# EAGLE board SD2IEC-Quad (EAGLE 6.6.0)
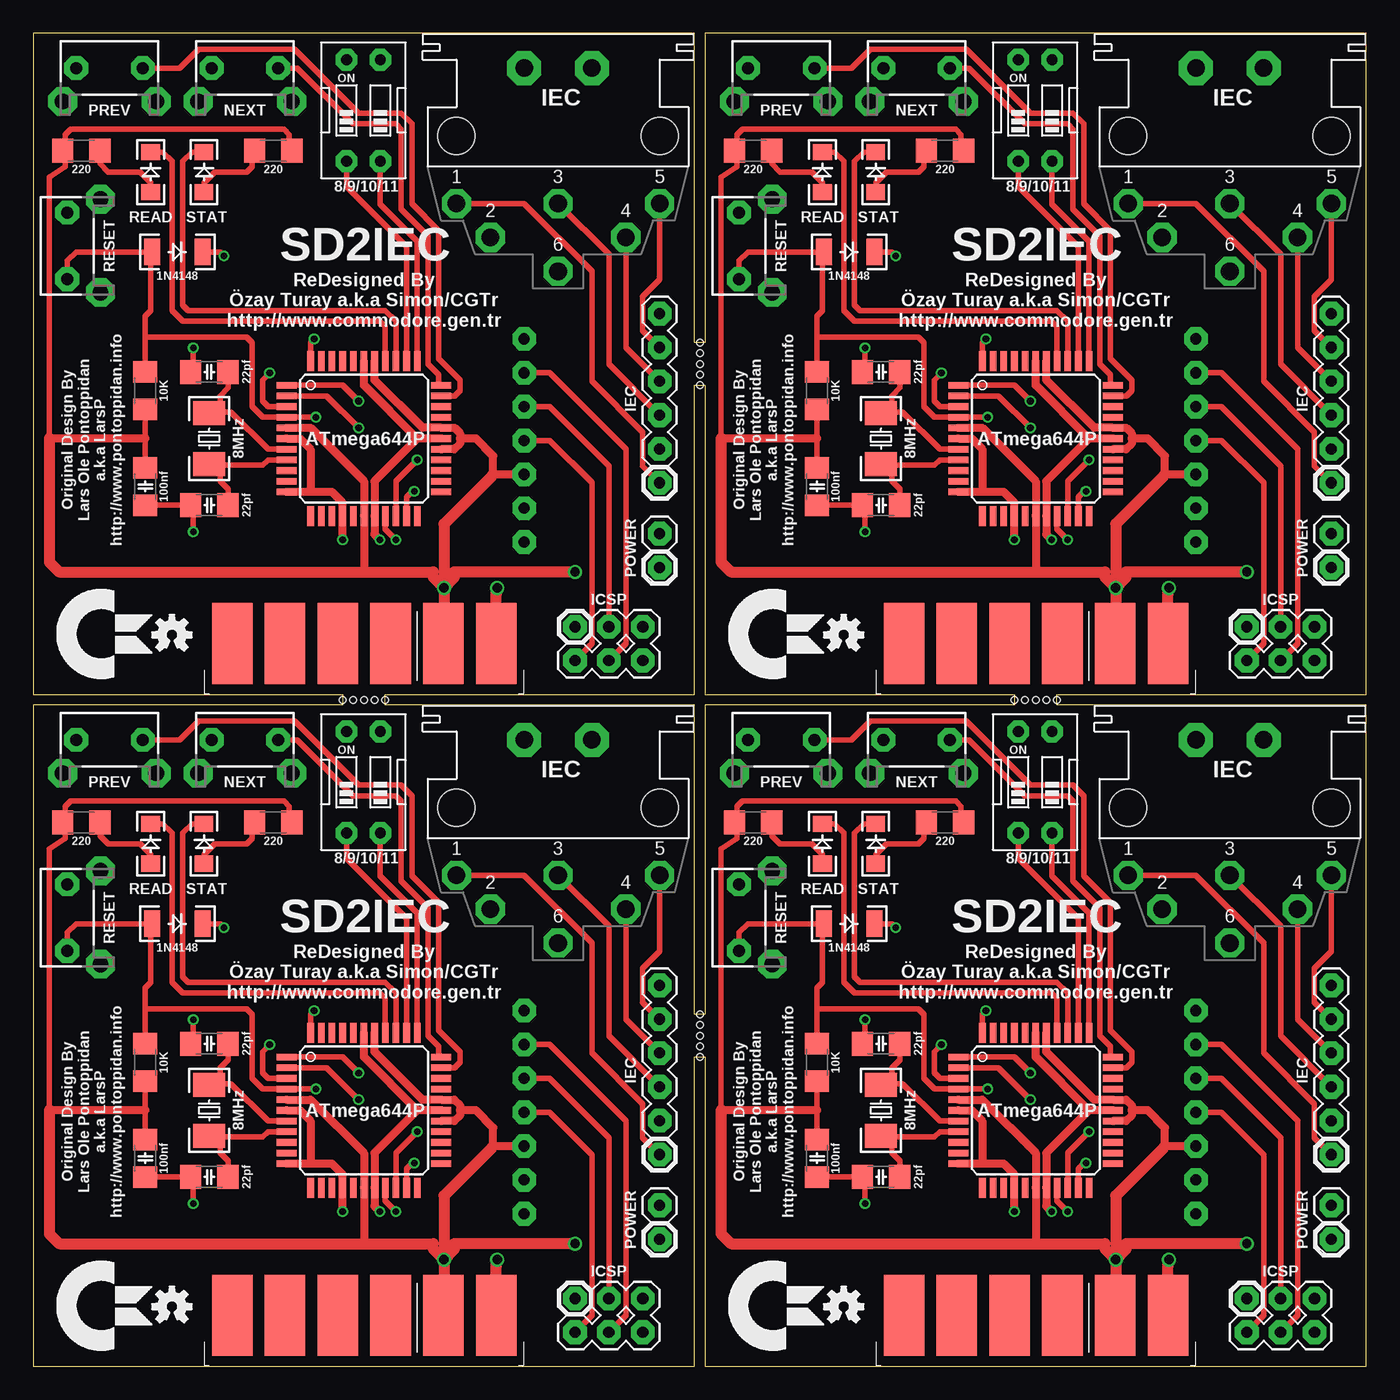
[diagram p0: board, top side]
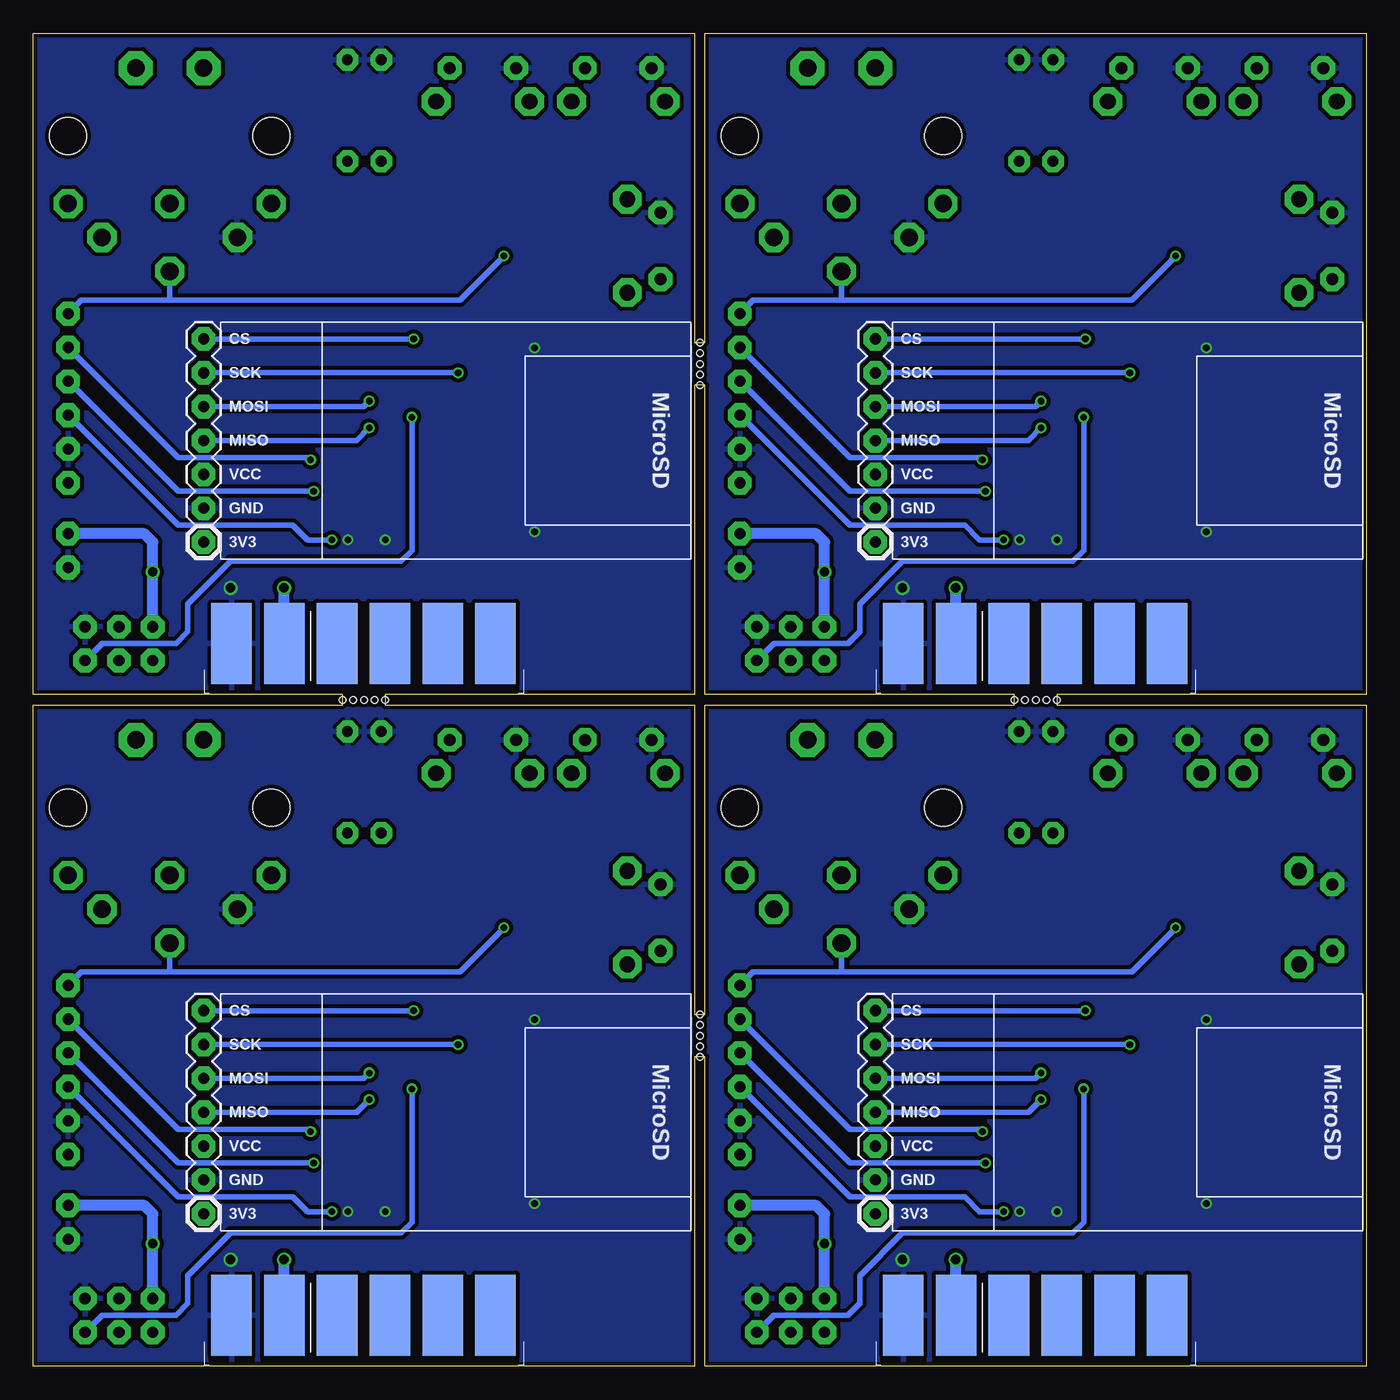
[diagram p1: board, bottom side, seen from below]

Size 100 x 100 mm. Coordinates in mm from the lower left corner, seen from the top.
Outline: 0,0 49.6,0 49.6,23.2 50.4,23.2 50.4,0 100,0 100,49.6 76.8,49.6 76.8,50.4 100,50.4 100,100 50.4,100 50.4,76.8 49.6,76.8 49.6,100 0,100 0,50.4 23.2,50.4 23.2,49.6 0,49.6 0,0
Outline: 49.6,26.4 49.6,49.6 26.4,49.6 26.4,50.4 49.6,50.4 49.6,73.6 50.4,73.6 50.4,50.4 73.6,50.4 73.6,49.6 50.4,49.6 50.4,26.4 49.6,26.4
Copper layers (1*16): Top 0.035mm / dielectric 1.5mm / Bottom 0.035mm
Design rules "DirtyPCBs": minimum track width 5mil, minimum drill 12mil, track to track 5mil, track to pad 5mil, pad to pad 5mil, via to via 5mil, smd to smd 0mil, copper to edge 10mil, drill to drill 10mil, minimum pad ring 10mil, minimum via ring 6mil, stop-mask expansion 2mil, vias tented up to drill 25mil, thermal gap 10mil
Holes 0.5 mm at 50,26.4 23.2,50 24,50 73.6,50 50,76.8 24.8,50 25.6,50 26.4,50 50,25.6 50,24.8 50,24 50,23.2 50,76 50,75.2 50,74.4 50,73.6 74.4,50 75.2,50 76,50 76.8,50

## Footprints (pad centres in the part's own frame; a part is rotated, then mirrored left to right if it is on the bottom)
CAPACITOR_CERAMIC_1206 = smd 1.6 x 1.8: 1 -1.4,0; 2 1.4,0
C64_DATASETTE_PADS = smd 3.048 x 6.096: 1 9.927,-3.781; 2 5.967,-3.781; 3 2.007,-3.781; 4 -1.953,-3.781; 5 -5.913,-3.781; 6 -9.873,-3.781 | smd 3.048 x 6.096 bottom: A 9.927,-3.781; B 5.967,-3.781; C 2.007,-3.781; D -1.953,-3.781; E -5.913,-3.781; F -9.873,-3.781
DIODE_NORMAL_SMT = smd 1.2 x 2: A -1.9,0; C 1.9,0
HDR_1X02 = drill 0.838 pad 1.778 octagon: 1 0,0; 2 2.54,0
HDR_1X06 = drill 0.838 pad 1.778 octagon: 1 0,0; 2 2.54,0; 3 5.08,0; 4 7.62,0; 5 10.16,0; 6 12.7,0
HDR_2X03 = drill 0.838 pad 1.778 octagon: 1 0,0; 2 2.54,0; 3 5.08,0; 4 0,-2.54; 5 2.54,-2.54; 6 5.08,-2.54
C64_IEC_DIN6 = drill 1.321 pad 2.184 octagon: 1 7.62,5.08; 2 5.08,7.62; 3 0,5.08; 4 -5.08,7.62; 5 -7.62,5.08; 6 0,10.16 | drill 1.321 pad 2.54 octagon: PAD@1 -2.54,-5.08; PAD@2 2.54,-5.08 | hole 2.794: 7.62,0; -7.62,0
LED_1206 = smd 1.2 x 1.4: A -1.5,0; C 1.5,0
TQFP44 = smd 1.5 x 0.5: 1 -5.8,4; 2 -5.8,3.2; 3 -5.8,2.4; 4 -5.8,1.6; 5 -5.8,0.8; 6 -5.8,0; 7 -5.8,-0.8; 8 -5.8,-1.6; 9 -5.8,-2.4; 10 -5.8,-3.2; 11 -5.8,-4; 23 5.8,-4; 24 5.8,-3.2; 25 5.8,-2.4; 26 5.8,-1.6; 27 5.8,-0.8; 28 5.8,0; 29 5.8,0.8; 30 5.8,1.6; 31 5.8,2.4; 32 5.8,3.2; 33 5.8,4 | smd 0.5 x 1.5: 12 -4,-5.8; 13 -3.2,-5.8; 14 -2.4,-5.8; 15 -1.6,-5.8; 16 -0.8,-5.8; 17 0,-5.8; 18 0.8,-5.8; 19 1.6,-5.8; 20 2.4,-5.8; 21 3.2,-5.8; 22 4,-5.8; 34 4,5.8; 35 3.2,5.8; 36 2.4,5.8; 37 1.6,5.8; 38 0.8,5.8; 39 0,5.8; 40 -0.8,5.8; 41 -1.6,5.8; 42 -2.4,5.8; 43 -3.2,5.8; 44 -4,5.8
RESISTOR_1206 = smd 1.6 x 1.8: 1 -1.4,0; 2 1.4,0
MICROSD_RTL = drill 0.838 pad 1.778 octagon: 3V3 7.62,1.27; CS -7.62,1.27; GND 5.08,1.27; MISO 0,1.27; MOSI -2.54,1.27; SCK -5.08,1.27; VCC 2.54,1.27
SWITCH_THT_SIDE = drill 0.889 pad 1.778 octagon: 1 -2.5,0; 2 2.5,0 | drill 1.194 pad 2.159 octagon: ANCHOR1 -3.5,2.5; ANCHOR2 3.5,2.5
SWITCH_DIP_02 = drill 0.813 pad 1.626 octagon: 1 -1.27,-3.81; 2 1.27,-3.81; 3 1.27,3.81; 4 -1.27,3.81
XTAL_5032 = smd 1.8 x 2.4: 1 -1.9,0; 2 1.9,0

## Placement (x,y rotation side)
C1  100nf  [CAPACITOR_CERAMIC_1206]  8.4,15.6 90 top
C2  22pf  [CAPACITOR_CERAMIC_1206]  13.2,14.2 0 top
C3  22pf  [CAPACITOR_CERAMIC_1206]  13.2,24.2 0 top
C4  100nf  [CAPACITOR_CERAMIC_1206]  58.8,15.6 90 top
C5  22pf  [CAPACITOR_CERAMIC_1206]  63.6,14.2 0 top
C6  22pf  [CAPACITOR_CERAMIC_1206]  63.6,24.2 0 top
C7  100nf  [CAPACITOR_CERAMIC_1206]  8.4,66 90 top
C8  22pf  [CAPACITOR_CERAMIC_1206]  13.2,64.6 0 top
C9  22pf  [CAPACITOR_CERAMIC_1206]  13.2,74.6 0 top
C10  100nf  [CAPACITOR_CERAMIC_1206]  58.8,66 90 top
C11  22pf  [CAPACITOR_CERAMIC_1206]  63.6,64.6 0 top
C12  22pf  [CAPACITOR_CERAMIC_1206]  63.6,74.6 0 top
CN1  DATASETTE  [C64_DATASETTE_PADS]  24.8,7.6 0 top
CN2  DATASETTE  [C64_DATASETTE_PADS]  75.2,7.6 0 top
CN3  DATASETTE  [C64_DATASETTE_PADS]  24.8,58 0 top
CN4  DATASETTE  [C64_DATASETTE_PADS]  75.2,58 0 top
D1  1N4148  [DIODE_NORMAL_SMT]  10.8,33.2 0 top
D2  1N4148  [DIODE_NORMAL_SMT]  61.2,33.2 0 top
D3  1N4148  [DIODE_NORMAL_SMT]  10.8,83.6 0 top
D4  1N4148  [DIODE_NORMAL_SMT]  61.2,83.6 0 top
J1  POWER  [HDR_1X02]  46.99,9.53 90 top
J2  IEC  [HDR_1X06]  46.99,15.88 90 top
J3  ICSP  [HDR_2X03]  40.64,5.08 0 top
J4  IEC  [C64_IEC_DIN6]  39.37,41.91 180 top
J5  IEC  [C64_IEC_DIN6]  89.77,41.91 180 top
J6  POWER  [HDR_1X02]  97.39,9.53 90 top
J7  IEC  [HDR_1X06]  97.39,15.88 90 top
J8  ICSP  [HDR_2X03]  91.04,5.08 0 top
J9  IEC  [C64_IEC_DIN6]  39.37,92.31 180 top
J10  POWER  [HDR_1X02]  46.99,59.92 90 top
J11  IEC  [HDR_1X06]  46.99,66.28 90 top
J12  ICSP  [HDR_2X03]  40.64,55.48 0 top
J13  IEC  [C64_IEC_DIN6]  89.77,92.31 180 top
J14  POWER  [HDR_1X02]  97.39,59.92 90 top
J15  IEC  [HDR_1X06]  97.39,66.28 90 top
J16  ICSP  [HDR_2X03]  91.04,55.48 0 top
LED1  STAT  [LED_1206]  12.8,39.2 90 top
LED2  READ  [LED_1206]  8.8,39.2 90 top
LED3  STAT  [LED_1206]  63.2,39.2 90 top
LED4  READ  [LED_1206]  59.2,39.2 90 top
LED5  STAT  [LED_1206]  12.8,89.6 90 top
LED6  READ  [LED_1206]  8.8,89.6 90 top
LED7  STAT  [LED_1206]  63.2,89.6 90 top
LED8  READ  [LED_1206]  59.2,89.6 90 top
LOGO1  OSHW_LOGO_SMALL  [OSHW_LOGO_SMALL]  10.4,4.47 0 top
LOGO2  OSHW_LOGO_SMALL  [OSHW_LOGO_SMALL]  60.8,4.47 0 top
LOGO3  OSHW_LOGO_SMALL  [OSHW_LOGO_SMALL]  10.4,54.87 0 top
LOGO4  OSHW_LOGO_SMALL  [OSHW_LOGO_SMALL]  60.8,54.87 0 top
MCU  ATmega644P  [TQFP44]  24.8,19.2 0 top
MCU1  ATmega644P  [TQFP44]  75.2,19.2 0 top
MCU2  ATmega644P  [TQFP44]  24.8,69.6 0 top
MCU3  ATmega644P  [TQFP44]  75.2,69.6 0 top
R1  220  [RESISTOR_1206]  18,40.8 0 top
R2  220  [RESISTOR_1206]  3.6,40.8 180 top
R3  10K  [RESISTOR_1206]  8.4,22.8 90 top
R4  220  [RESISTOR_1206]  68.4,40.8 0 top
R5  220  [RESISTOR_1206]  54,40.8 180 top
R6  10K  [RESISTOR_1206]  58.8,22.8 90 top
R7  220  [RESISTOR_1206]  18,91.2 0 top
R8  220  [RESISTOR_1206]  3.6,91.2 180 top
R9  10K  [RESISTOR_1206]  8.4,73.2 90 top
R10  220  [RESISTOR_1206]  68.4,91.2 0 top
R11  220  [RESISTOR_1206]  54,91.2 180 top
R12  10K  [RESISTOR_1206]  58.8,73.2 90 top
SD  MicroSD  [MICROSD_RTL]  38.1,19.05 270 bottom
SD1  MicroSD  [MICROSD_RTL]  88.5,19.05 270 bottom
SD2  MicroSD  [MICROSD_RTL]  38.1,69.45 270 bottom
SD3  MicroSD  [MICROSD_RTL]  88.5,69.45 270 bottom
SW1  NEXT  [SWITCH_THT_SIDE]  15.88,46.99 180 top
SW2  PREV  [SWITCH_THT_SIDE]  5.71,46.99 180 top
SW3  RESET  [SWITCH_THT_SIDE]  2.54,33.66 270 top
SW4  8/9/10/11  [SWITCH_DIP_02]  24.77,43.81 0 top
SW5  NEXT  [SWITCH_THT_SIDE]  66.28,46.99 180 top
SW6  PREV  [SWITCH_THT_SIDE]  56.12,46.99 180 top
SW7  RESET  [SWITCH_THT_SIDE]  52.94,33.66 270 top
SW8  8/9/10/11  [SWITCH_DIP_02]  75.17,43.81 0 top
SW9  NEXT  [SWITCH_THT_SIDE]  15.88,97.39 180 top
SW10  PREV  [SWITCH_THT_SIDE]  5.71,97.39 180 top
SW11  RESET  [SWITCH_THT_SIDE]  2.54,84.06 270 top
SW12  8/9/10/11  [SWITCH_DIP_02]  24.77,94.22 0 top
SW13  NEXT  [SWITCH_THT_SIDE]  66.28,97.39 180 top
SW14  PREV  [SWITCH_THT_SIDE]  56.12,97.39 180 top
SW15  RESET  [SWITCH_THT_SIDE]  52.94,84.06 270 top
SW16  8/9/10/11  [SWITCH_DIP_02]  75.17,94.22 0 top
XTAL  8MHz  [XTAL_5032]  13.2,19.2 90 top
XTAL1  8MHz  [XTAL_5032]  63.6,19.2 90 top
XTAL2  8MHz  [XTAL_5032]  13.2,69.6 90 top
XTAL3  8MHz  [XTAL_5032]  63.6,69.6 90 top

## Library data of the parts
C1-C12 D1-D4 LED1-LED8 LOGO1-LOGO4 R1-R12 SW1-SW16 = sj_standart
CN1-CN4 J4 J5 J9 J13 = sj_commodore
J1-J3 J6-J8 J10-J12 J14-J16 = sj_connectors
MCU MCU1-MCU3 XTAL XTAL1-XTAL3 = sj_mcu
SD SD1-SD3 = sj_arduino

## Nets
8/1: MCU1.35 SW8.1
8/2: MCU2.35 SW12.1
8/3: MCU3.35 SW16.1
8/9: MCU.35 SW4.1
10/1: MCU1.34 SW8.2
10/2: MCU2.34 SW12.2
10/3: MCU3.34 SW16.2
10/11: MCU.34 SW4.2
CS: MCU.44 SD.CS
CS1: MCU1.44 SD1.CS
CS2: MCU2.44 SD2.CS
CS3: MCU3.44 SD3.CS
GND: C1.1 C2.1 C3.1 CN1.1 CN1.A J1.1 J2.2 J3.3 J4.2 MCU.6 MCU.11 MCU.15 MCU.18 MCU.28 MCU.39 SD.GND SW1.2 SW2.2 SW3.1 SW4.3 SW4.4
GND1: C4.1 C5.1 C6.1 CN2.1 CN2.A J5.2 J6.1 J7.2 J8.3 MCU1.6 MCU1.11 MCU1.15 MCU1.18 MCU1.28 MCU1.39 SD1.GND SW5.2 SW6.2 SW7.1 SW8.3 SW8.4
GND2: C7.1 C8.1 C9.1 CN3.1 CN3.A J9.2 J10.1 J11.2 J12.3 MCU2.6 MCU2.11 MCU2.15 MCU2.18 MCU2.28 MCU2.39 SD2.GND SW9.2 SW10.2 SW11.1 SW12.3 SW12.4
GND3: C10.1 C11.1 C12.1 CN4.1 CN4.A J13.2 J14.1 J15.2 J16.3 MCU3.6 MCU3.11 MCU3.15 MCU3.18 MCU3.28 MCU3.39 SD3.GND SW13.2 SW14.2 SW15.1 SW16.3 SW16.4
IEC_ATN: J2.3 J4.3 MCU.19
IEC_ATN1: J5.3 J7.3 MCU1.19
IEC_ATN2: J9.3 J11.3 MCU2.19
IEC_ATN3: J13.3 J15.3 MCU3.19
IEC_CLK: J2.4 J4.4 MCU.21
IEC_CLK1: J5.4 J7.4 MCU1.21
IEC_CLK2: J9.4 J11.4 MCU2.21
IEC_CLK3: J13.4 J15.4 MCU3.21
IEC_DATA: J2.5 J4.5 MCU.20
IEC_DATA1: J5.5 J7.5 MCU1.20
IEC_DATA2: J9.5 J11.5 MCU2.20
IEC_DATA3: J13.5 J15.5 MCU3.20
IEC_RST: D1.C J2.6 J4.6
IEC_RST1: D2.C J5.6 J7.6
IEC_RST2: D3.C J9.6 J11.6
IEC_RST3: D4.C J13.6 J15.6
IEC_SRQ: J2.1 J4.1
IEC_SRQ1: J5.1 J7.1
IEC_SRQ2: J9.1 J11.1
IEC_SRQ3: J13.1 J15.1
MISO: J3.4 MCU.2 SD.MISO
MISO1: J8.4 MCU1.2 SD1.MISO
MISO2: J12.4 MCU2.2 SD2.MISO
MISO3: J16.4 MCU3.2 SD3.MISO
MOSI: J3.2 MCU.1 SD.MOSI
MOSI1: J8.2 MCU1.1 SD1.MOSI
MOSI2: J12.2 MCU2.1 SD2.MOSI
MOSI3: J16.2 MCU3.1 SD3.MOSI
NEXT: MCU.33 SW1.1
NEXT1: MCU1.33 SW5.1
NEXT2: MCU2.33 SW9.1
NEXT3: MCU3.33 SW13.1
PREV: MCU.32 SW2.1
PREV1: MCU1.32 SW6.1
PREV2: MCU2.32 SW10.1
PREV3: MCU3.32 SW14.1
READ: LED2.C MCU.37
READ1: LED2.A R2.1
READ2: LED4.C MCU1.37
READ3: LED4.A R5.1
READ4: LED6.C MCU2.37
READ5: LED6.A R8.1
READ6: LED8.C MCU3.37
READ7: LED8.A R11.1
RST: D1.A J3.6 MCU.4 R3.2 SW3.2
RST1: D2.A J8.6 MCU1.4 R6.2 SW7.2
RST2: D3.A J12.6 MCU2.4 R9.2 SW11.2
RST3: D4.A J16.6 MCU3.4 R12.2 SW15.2
SCK: J3.5 MCU.3 SD.SCK
SCK1: J8.5 MCU1.3 SD1.SCK
SCK2: J12.5 MCU2.3 SD2.SCK
SCK3: J16.5 MCU3.3 SD3.SCK
SELECT: LED1.C MCU.36
SELECT1: LED1.A R1.1
SELECT2: LED3.C MCU1.36
SELECT3: LED3.A R4.1
SELECT4: LED5.C MCU2.36
SELECT5: LED5.A R7.1
SELECT6: LED7.C MCU3.36
SELECT7: LED7.A R10.1
VCC: C1.2 CN1.2 CN1.B J1.2 J3.1 MCU.5 MCU.17 MCU.27 MCU.29 MCU.38 R1.2 R2.2 R3.1 SD.VCC
VCC1: C4.2 CN2.2 CN2.B J6.2 J8.1 MCU1.5 MCU1.17 MCU1.27 MCU1.29 MCU1.38 R4.2 R5.2 R6.1 SD1.VCC
VCC2: C7.2 CN3.2 CN3.B J10.2 J12.1 MCU2.5 MCU2.17 MCU2.27 MCU2.29 MCU2.38 R7.2 R8.2 R9.1 SD2.VCC
VCC3: C10.2 CN4.2 CN4.B J14.2 J16.1 MCU3.5 MCU3.17 MCU3.27 MCU3.29 MCU3.38 R10.2 R11.2 R12.1 SD3.VCC
XTAL1: C2.2 MCU.8 XTAL.1
XTAL2: C3.2 MCU.7 XTAL.2
XTAL3: C5.2 MCU1.8 XTAL1.1
XTAL4: C6.2 MCU1.7 XTAL1.2
XTAL5: C8.2 MCU2.8 XTAL2.1
XTAL6: C9.2 MCU2.7 XTAL2.2
XTAL7: C11.2 MCU3.8 XTAL3.1
XTAL8: C12.2 MCU3.7 XTAL3.2

## Tracks (layer width: path | path; a pad name or v marks a point on that pad's centre or on a via)
8/1
  Top 0.406: SW8.1 73.89,38.1 78.4,33.6 MCU1.35
8/2
  Top 0.406: SW12.1 23.5,88.5 28,84 MCU2.35
8/3
  Top 0.406: SW16.1 73.89,88.5 78.4,84 MCU3.35
8/9
  Top 0.406: SW4.1 23.5,38.1 28,33.6 MCU.35
10/1
  Top 0.406: SW8.2 76.44,36.77 79.2,34 MCU1.34
10/2
  Top 0.406: SW12.2 26.04,87.17 28.8,84.4 MCU2.34
10/3
  Top 0.406: SW16.2 76.44,87.17 79.2,84.4 MCU3.34
10/11
  Top 0.406: SW4.2 26.04,36.77 28.8,34 MCU.34
CS  (via drill 0.5)
  Top 0.406: v21.07,26.67 20.8,26.4 MCU.44
  Bottom 0.406: SD.CS v21.07,26.67
CS1  (via drill 0.5)
  Top 0.406: v71.47,26.67 71.2,26.4 MCU1.44
  Bottom 0.406: SD1.CS v71.47,26.67
CS2  (via drill 0.5)
  Top 0.406: v21.07,77.07 20.8,76.8 MCU2.44
  Bottom 0.406: SD2.CS v21.07,77.07
CS3  (via drill 0.5)
  Top 0.406: v71.47,77.07 71.2,76.8 MCU3.44
  Bottom 0.406: SD3.CS v71.47,77.07
GND  (via drill 0.5, 0.7)
  Top 0.406: C1.1 C2.1 12,14 v12,12.2 | v12,26 12,24.4 C3.1
  Top 0.61: MCU.28 28.8,19.2 | 28.8,19.2 25.6,16 MCU.18 25.6,12 v26,11.6 | 28.8,19.2 24.8,23.2 MCU.39 | v23.2,11.6 MCU.15 23.2,14.4 22.4,15.2 20.8,15.2 | MCU.6 20,19.2 20.8,18.4 20.8,15.2 | 20.8,15.2 MCU.11
  Top 0.813: CN1.1 34.73,7.53 v34.8,8
  pour Bottom (isolate 0.305): 0,49.6 49.6,49.6 49.6,0 0,0
GND1  (via drill 0.5, 0.7)
  Top 0.406: C4.1 C5.1 62.4,14 v62.4,12.2 | v62.4,26 62.4,24.4 C6.1
  Top 0.61: MCU1.28 79.2,19.2 | 79.2,19.2 76,16 MCU1.18 76,12 v76.4,11.6 | 79.2,19.2 75.2,23.2 MCU1.39 | v73.6,11.6 MCU1.15 73.6,14.4 72.8,15.2 71.2,15.2 | MCU1.6 70.4,19.2 71.2,18.4 71.2,15.2 | 71.2,15.2 MCU1.11
  Top 0.813: CN2.1 85.13,7.53 v85.2,8
  pour Bottom (isolate 0.305): 50.4,49.6 100,49.6 100,0 50.4,0
GND2  (via drill 0.5, 0.7)
  Top 0.406: C7.1 C8.1 12,64.4 v12,62.6 | v12,76.4 12,74.8 C9.1
  Top 0.61: MCU2.28 28.8,69.6 | 28.8,69.6 25.6,66.4 MCU2.18 25.6,62.4 v26,62 | 28.8,69.6 24.8,73.6 MCU2.39 | v23.2,62 MCU2.15 23.2,64.8 22.4,65.6 20.8,65.6 | MCU2.6 20,69.6 20.8,68.8 20.8,65.6 | 20.8,65.6 MCU2.11
  Top 0.813: CN3.1 34.73,57.93 v34.8,58.4
  pour Bottom (isolate 0.305): 0,100 49.6,100 49.6,50.4 0,50.4
GND3  (via drill 0.5, 0.7)
  Top 0.406: C10.1 C11.1 62.4,64.4 v62.4,62.6 | v62.4,76.4 62.4,74.8 C12.1
  Top 0.61: MCU3.28 79.2,69.6 | 79.2,69.6 76,66.4 MCU3.18 76,62.4 v76.4,62 | 79.2,69.6 75.2,73.6 MCU3.39 | v73.6,62 MCU3.15 73.6,64.8 72.8,65.6 71.2,65.6 | MCU3.6 70.4,69.6 71.2,68.8 71.2,65.6 | 71.2,65.6 MCU3.11
  Top 0.813: CN4.1 85.13,57.93 v85.2,58.4
  pour Bottom (isolate 0.305): 50.4,100 100,100 100,50.4 50.4,50.4
IEC_ATN  (via drill 0.5)
  Top 0.406: MCU.19 26.4,12.4 v27.2,11.6 | J2.3 43.18,24.77 43.18,33.02 J4.3
  Bottom 0.406: J2.3 38.73,12.7 30.12,12.7 29.02,11.6 v27.2,11.6
IEC_ATN1  (via drill 0.5)
  Top 0.406: MCU1.19 76.8,12.4 v77.6,11.6 | J7.3 93.58,24.77 93.58,33.02 J5.3
  Bottom 0.406: J7.3 89.14,12.7 80.53,12.7 79.42,11.6 v77.6,11.6
IEC_ATN2  (via drill 0.5)
  Top 0.406: MCU2.19 26.4,62.8 v27.2,62 | J11.3 43.18,75.17 43.18,83.42 J9.3
  Bottom 0.406: J11.3 38.73,63.1 30.12,63.1 29.02,62 v27.2,62
IEC_ATN3  (via drill 0.5)
  Top 0.406: MCU3.19 76.8,62.8 v77.6,62 | J15.3 93.58,75.17 93.58,83.42 J13.3
  Bottom 0.406: J15.3 89.14,63.1 80.53,63.1 79.42,62 v77.6,62
IEC_CLK  (via drill 0.5)
  Top 0.406: v28.57,15.24 28.44,15.24 28,14.8 MCU.21 | J2.4 44.45,26.04 J4.4
  Bottom 0.406: J2.4 38.73,15.24 v28.57,15.24
IEC_CLK1  (via drill 0.5)
  Top 0.406: v78.97,15.24 78.84,15.24 78.4,14.8 MCU1.21 | J7.4 94.85,26.04 J5.4
  Bottom 0.406: J7.4 89.14,15.24 v78.97,15.24
IEC_CLK2  (via drill 0.5)
  Top 0.406: v28.57,65.64 28.44,65.64 28,65.2 MCU2.21 | J11.4 44.45,76.44 J9.4
  Bottom 0.406: J11.4 38.73,65.64 v28.57,65.64
IEC_CLK3  (via drill 0.5)
  Top 0.406: v78.97,65.64 78.84,65.64 78.4,65.2 MCU3.21 | J15.4 94.85,76.44 J13.4
  Bottom 0.406: J15.4 89.14,65.64 v78.97,65.64
IEC_DATA  (via drill 0.5)
  Top 0.406: MCU.20 27.2,16 v28.8,17.6 | J2.5 45.72,27.3 45.72,29.84 46.99,31.11 J4.5
  Bottom 0.406: J2.5 38.73,17.78 28.98,17.78 v28.8,17.6
IEC_DATA1  (via drill 0.5)
  Top 0.406: MCU1.20 77.6,16 v79.2,17.6 | J7.5 96.12,27.3 96.12,29.84 97.39,31.11 J5.5
  Bottom 0.406: J7.5 89.14,17.78 79.38,17.78 v79.2,17.6
IEC_DATA2  (via drill 0.5)
  Top 0.406: MCU2.20 27.2,66.4 v28.8,68 | J11.5 45.72,77.7 45.72,80.25 46.99,81.52 J9.5
  Bottom 0.406: J11.5 38.73,68.18 28.98,68.18 v28.8,68
IEC_DATA3  (via drill 0.5)
  Top 0.406: MCU3.20 77.6,66.4 v79.2,68 | J15.5 96.12,77.7 96.12,80.25 97.39,81.52 J13.5
  Bottom 0.406: J15.5 89.14,68.18 79.38,68.18 v79.2,68
IEC_RST  (via drill 0.5)
  Top 0.406: D1.C 14,33.2 v14.3,32.9
  Bottom 0.406: 39.37,29.6 17.6,29.6 v14.3,32.9 | 39.37,29.6 46,29.6 46.99,28.61 J2.6 | J4.6 39.37,29.6
IEC_RST1  (via drill 0.5)
  Top 0.406: D2.C 64.4,33.2 v64.7,32.9
  Bottom 0.406: 89.77,29.6 68,29.6 v64.7,32.9 | 89.77,29.6 96.4,29.6 97.39,28.61 J7.6 | J5.6 89.77,29.6
IEC_RST2  (via drill 0.5)
  Top 0.406: D3.C 14,83.6 v14.3,83.3
  Bottom 0.406: 39.37,80 17.6,80 v14.3,83.3 | 39.37,80 46,80 46.99,79.01 J11.6 | J9.6 39.37,80
IEC_RST3  (via drill 0.5)
  Top 0.406: D4.C 64.4,83.6 v64.7,83.3
  Bottom 0.406: 89.77,80 68,80 v64.7,83.3 | 89.77,80 96.4,80 97.39,79.01 J15.6 | J13.6 89.77,80
IEC_SRQ
  Top 0.406: J2.1 45.72,17.14 45.72,19.68 41.91,23.5 41.91,31.75 36.83,36.83 J4.1
IEC_SRQ1
  Top 0.406: J7.1 96.12,17.14 96.12,19.68 92.31,23.5 92.31,31.75 87.23,36.83 J5.1
IEC_SRQ2
  Top 0.406: J11.1 45.72,67.55 45.72,70.08 41.91,73.89 41.91,82.15 36.83,87.23 J9.1
IEC_SRQ3
  Top 0.406: J15.1 96.12,67.55 96.12,70.08 92.31,73.89 92.31,82.15 87.23,87.23 J13.1
MISO  (via drill 0.5)
  Top 0.406: v24.4,20 22,22.4 MCU.2 | SD.MISO 38.73,19.05 41.91,15.88 41.91,3.81 J3.4
  Bottom 0.406: SD.MISO 25.35,19.05 v24.4,20
MISO1  (via drill 0.5)
  Top 0.406: v74.8,20 72.4,22.4 MCU1.2 | SD1.MISO 89.14,19.05 92.31,15.88 92.31,3.81 J8.4
  Bottom 0.406: SD1.MISO 75.75,19.05 v74.8,20
MISO2  (via drill 0.5)
  Top 0.406: v24.4,70.4 22,72.8 MCU2.2 | SD2.MISO 38.73,69.45 41.91,66.28 41.91,54.21 J12.4
  Bottom 0.406: SD2.MISO 25.35,69.45 v24.4,70.4
MISO3  (via drill 0.5)
  Top 0.406: v74.8,70.4 72.4,72.8 MCU3.2 | SD3.MISO 89.14,69.45 92.31,66.28 92.31,54.21 J16.4
  Bottom 0.406: SD3.MISO 75.75,69.45 v74.8,70.4
MOSI  (via drill 0.5)
  Top 0.406: v24.4,22 23.2,23.2 MCU.1 | SD.MOSI 38.73,21.59 43.18,17.14 J3.2
  Bottom 0.406: SD.MOSI 24.81,21.59 v24.4,22
MOSI1  (via drill 0.5)
  Top 0.406: v74.8,22 73.6,23.2 MCU1.1 | SD1.MOSI 89.14,21.59 93.58,17.14 J8.2
  Bottom 0.406: SD1.MOSI 75.21,21.59 v74.8,22
MOSI2  (via drill 0.5)
  Top 0.406: v24.4,72.4 23.2,73.6 MCU2.1 | SD2.MOSI 38.73,71.99 43.18,67.55 J12.2
  Bottom 0.406: SD2.MOSI 24.81,71.99 v24.4,72.4
MOSI3  (via drill 0.5)
  Top 0.406: v74.8,72.4 73.6,73.6 MCU3.1 | SD3.MOSI 89.14,71.99 93.58,67.55 J16.2
  Bottom 0.406: SD3.MOSI 75.21,71.99 v74.8,72.4
NEXT
  Top 0.406: SW1.1 19.81,46.99 24,42.8 27.2,42.8 27.6,42.4 27.6,36.4 29.6,34.4 29.6,24.8 30.4,24 30.4,23.4 MCU.33
NEXT1
  Top 0.406: SW5.1 70.21,46.99 74.4,42.8 77.6,42.8 78,42.4 78,36.4 80,34.4 80,24.8 80.8,24 80.8,23.4 MCU1.33
NEXT2
  Top 0.406: SW9.1 19.81,97.39 24,93.2 27.2,93.2 27.6,92.8 27.6,86.8 29.6,84.8 29.6,75.2 30.4,74.4 30.4,73.8 MCU2.33
NEXT3
  Top 0.406: SW13.1 70.21,97.39 74.4,93.2 77.6,93.2 78,92.8 78,86.8 80,84.8 80,75.2 80.8,74.4 80.8,73.8 MCU3.33
PREV
  Top 0.406: SW2.1 10.99,46.99 12.4,48.4 19.6,48.4 24.4,43.6 27.6,43.6 28.4,42.8 28.4,36.8 30.4,34.8 30.4,25.2 32,23.6 32,22.8 31.6,22.4 MCU.32
PREV1
  Top 0.406: SW6.1 61.39,46.99 62.8,48.4 70,48.4 74.8,43.6 78,43.6 78.8,42.8 78.8,36.8 80.8,34.8 80.8,25.2 82.4,23.6 82.4,22.8 82,22.4 MCU1.32
PREV2
  Top 0.406: SW10.1 10.99,97.39 12.4,98.8 19.6,98.8 24.4,94 27.6,94 28.4,93.2 28.4,87.2 30.4,85.2 30.4,75.6 32,74 32,73.2 31.6,72.8 MCU2.32
PREV3
  Top 0.406: SW14.1 61.39,97.39 62.8,98.8 70,98.8 74.8,94 78,94 78.8,93.2 78.8,87.2 80.8,85.2 80.8,75.6 82.4,74 82.4,73.2 82,72.8 MCU3.32
READ
  Top 0.406: LED2.C 9.7,40.7 10.4,40 10.4,28.8 11.2,28 26,28 26.4,27.6 MCU.37
READ1
  Top 0.406: R2.1 5,39.8 5.6,39.2 8,39.2 8.8,38.4 LED2.A
READ2
  Top 0.406: LED4.C 60.1,40.7 60.8,40 60.8,28.8 61.6,28 76.4,28 76.8,27.6 MCU1.37
READ3
  Top 0.406: R5.1 55.4,39.8 56,39.2 58.4,39.2 59.2,38.4 LED4.A
READ4
  Top 0.406: LED6.C 9.7,91.1 10.4,90.4 10.4,79.2 11.2,78.4 26,78.4 26.4,78 MCU2.37
READ5
  Top 0.406: R8.1 5,90.2 5.6,89.6 8,89.6 8.8,88.8 LED6.A
READ6
  Top 0.406: LED8.C 60.1,91.1 60.8,90.4 60.8,79.2 61.6,78.4 76.4,78.4 76.8,78 MCU3.37
READ7
  Top 0.406: R11.1 55.4,90.2 56,89.6 58.4,89.6 59.2,88.8 LED8.A
RST  (via drill 0.5)
  Top 0.406: R3.2 8.4,26.8 | 8.4,26.8 8.4,28.4 8.8,28.8 8.8,33.1 D1.A 3.2,33.2 2.54,32.54 SW3.2 | 8.4,26.8 16,26.8 16.4,26.4 16.4,21.6 17.2,20.8 MCU.4 v21.2,20.8
  Bottom 0.406: J3.6 44.45,3.81 38.9,3.81 38,4.71 38,6.8 34.8,10 22,10 21.2,10.8 v21.2,20.8
RST1  (via drill 0.5)
  Top 0.406: R6.2 58.8,26.8 | 58.8,26.8 58.8,28.4 59.2,28.8 59.2,33.1 D2.A 53.6,33.2 52.94,32.54 SW7.2 | 58.8,26.8 66.4,26.8 66.8,26.4 66.8,21.6 67.6,20.8 MCU1.4 v71.6,20.8
  Bottom 0.406: J8.6 94.85,3.81 89.3,3.81 88.4,4.71 88.4,6.8 85.2,10 72.4,10 71.6,10.8 v71.6,20.8
RST2  (via drill 0.5)
  Top 0.406: R9.2 8.4,77.2 | 8.4,77.2 8.4,78.8 8.8,79.2 8.8,83.5 D3.A 3.2,83.6 2.54,82.94 SW11.2 | 8.4,77.2 16,77.2 16.4,76.8 16.4,72 17.2,71.2 MCU2.4 v21.2,71.2
  Bottom 0.406: J12.6 44.45,54.21 38.9,54.21 38,55.11 38,57.2 34.8,60.4 22,60.4 21.2,61.2 v21.2,71.2
RST3  (via drill 0.5)
  Top 0.406: R12.2 58.8,77.2 | 58.8,77.2 58.8,78.8 59.2,79.2 59.2,83.5 D4.A 53.6,83.6 52.94,82.94 SW15.2 | 58.8,77.2 66.4,77.2 66.8,76.8 66.8,72 67.6,71.2 MCU3.4 v71.6,71.2
  Bottom 0.406: J16.6 94.85,54.21 89.3,54.21 88.4,55.11 88.4,57.2 85.2,60.4 72.4,60.4 71.6,61.2 v71.6,71.2
SCK  (via drill 0.5)
  Top 0.406: v17.73,24.13 17.2,23.6 17.2,22 17.6,21.6 MCU.3 | SD.SCK 38.73,24.13 44.45,18.41 44.45,3.81 J3.5
  Bottom 0.406: SD.SCK v17.73,24.13
SCK1  (via drill 0.5)
  Top 0.406: v68.13,24.13 67.6,23.6 67.6,22 68,21.6 MCU1.3 | SD1.SCK 89.14,24.13 94.85,18.41 94.85,3.81 J8.5
  Bottom 0.406: SD1.SCK v68.13,24.13
SCK2  (via drill 0.5)
  Top 0.406: v17.73,74.53 17.2,74 17.2,72.4 17.6,72 MCU2.3 | SD2.SCK 38.73,74.53 44.45,68.81 44.45,54.21 J12.5
  Bottom 0.406: SD2.SCK v17.73,74.53
SCK3  (via drill 0.5)
  Top 0.406: v68.13,74.53 67.6,74 67.6,72.4 68,72 MCU3.3 | SD3.SCK 89.14,74.53 94.85,68.81 94.85,54.21 J16.5
  Bottom 0.406: SD3.SCK v68.13,74.53
SELECT
  Top 0.406: LED1.C 11.9,40.7 11.2,40 11.2,29.2 11.6,28.8 26.4,28.8 27.2,28 MCU.36
SELECT1
  Top 0.406: R1.1 16.6,40.2 16.4,40 16.4,39.6 16,39.2 13.6,39.2 12.8,38.4 LED1.A
SELECT2
  Top 0.406: LED3.C 62.3,40.7 61.6,40 61.6,29.2 62,28.8 76.8,28.8 77.6,28 MCU1.36
SELECT3
  Top 0.406: R4.1 67,40.2 66.8,40 66.8,39.6 66.4,39.2 64,39.2 63.2,38.4 LED3.A
SELECT4
  Top 0.406: LED5.C 11.9,91.1 11.2,90.4 11.2,79.6 11.6,79.2 26.4,79.2 27.2,78.4 MCU2.36
SELECT5
  Top 0.406: R7.1 16.6,90.6 16.4,90.4 16.4,90 16,89.6 13.6,89.6 12.8,88.8 LED5.A
SELECT6
  Top 0.406: LED7.C 62.3,91.1 61.6,90.4 61.6,79.6 62,79.2 76.8,79.2 77.6,78.4 MCU3.36
SELECT7
  Top 0.406: R10.1 67,90.6 66.8,90.4 66.8,90 66.4,89.6 64,89.6 63.2,88.8 LED7.A
VCC  (via drill 0.7)
  Top 0.406: C1.2 8.4,19.2 R3.1 | R1.2 19.2,41 19.2,42 18.8,42.4 2.8,42.4 2.4,42 2.4,41 R2.2 2.4,40.6 2.4,39.6 1.2,38.8 1.2,19.2 | 30.8,3.85 CN1.2 | 34.51,16.51 34.4,16.4
  Top 0.61: MCU.38 25.6,23.6 29.2,20 MCU.29 31.6,20 32,19.6 32,19.2 | MCU.5 20.8,20 24.8,16 MCU.17 24.8,9.2 | SD.VCC 34.51,16.51 34.51,17.89 33.2,19.2 32,19.2 | 8.4,19.2 1.2,19.2 | 32,19.2 32,18.8 31.6,18.4 MCU.27
  Top 0.813: 1.2,19.2 1.2,9.93 1.93,9.2 24.8,9.2 30,9.2 30,8.8 v30.8,8 | 34.4,16.4 30.8,12.8 v30.8,8 | v30.8,8 30.8,3.85 | v40.64,9.2 31.6,9.2 31.6,8.8 v30.8,8
  Bottom 0.406: 30.77,7.97 v30.8,8
  Bottom 0.813: CN1.2 30.77,7.97 | J3.1 v40.64,9.2 40.64,11.43 41.27,12.06 J1.2
VCC1  (via drill 0.7)
  Top 0.406: C4.2 58.8,19.2 R6.1 | R4.2 69.6,41 69.6,42 69.2,42.4 53.2,42.4 52.8,42 52.8,41 R5.2 52.8,40.6 52.8,39.6 51.6,38.8 51.6,19.2 | 81.2,3.85 CN2.2 | 84.91,16.51 84.8,16.4
  Top 0.61: MCU1.38 76,23.6 79.6,20 MCU1.29 82,20 82.4,19.6 82.4,19.2 | MCU1.5 71.2,20 75.2,16 MCU1.17 75.2,9.2 | SD1.VCC 84.91,16.51 84.91,17.89 83.6,19.2 82.4,19.2 | 58.8,19.2 51.6,19.2 | 82.4,19.2 82.4,18.8 82,18.4 MCU1.27
  Top 0.813: 51.6,19.2 51.6,9.93 52.33,9.2 75.2,9.2 80.4,9.2 80.4,8.8 v81.2,8 | 84.8,16.4 81.2,12.8 v81.2,8 | v81.2,8 81.2,3.85 | v91.04,9.2 82,9.2 82,8.8 v81.2,8
  Bottom 0.406: 81.17,7.97 v81.2,8
  Bottom 0.813: CN2.2 81.17,7.97 | J8.1 v91.04,9.2 91.04,11.43 91.67,12.06 J6.2
VCC2  (via drill 0.7)
  Top 0.406: C7.2 8.4,69.6 R9.1 | R7.2 19.2,91.4 19.2,92.4 18.8,92.8 2.8,92.8 2.4,92.4 2.4,91.4 R8.2 2.4,91 2.4,90 1.2,89.2 1.2,69.6 | 30.8,54.25 CN3.2 | 34.51,66.91 34.4,66.8
  Top 0.61: MCU2.38 25.6,74 29.2,70.4 MCU2.29 31.6,70.4 32,70 32,69.6 | MCU2.5 20.8,70.4 24.8,66.4 MCU2.17 24.8,59.6 | SD2.VCC 34.51,66.91 34.51,68.29 33.2,69.6 32,69.6 | 8.4,69.6 1.2,69.6 | 32,69.6 32,69.2 31.6,68.8 MCU2.27
  Top 0.813: 1.2,69.6 1.2,60.33 1.93,59.6 24.8,59.6 30,59.6 30,59.2 v30.8,58.4 | 34.4,66.8 30.8,63.2 v30.8,58.4 | v30.8,58.4 30.8,54.25 | v40.64,59.6 31.6,59.6 31.6,59.2 v30.8,58.4
  Bottom 0.406: 30.77,58.37 v30.8,58.4
  Bottom 0.813: CN3.2 30.77,58.37 | J12.1 v40.64,59.6 40.64,61.83 41.27,62.47 J10.2
VCC3  (via drill 0.7)
  Top 0.406: C10.2 58.8,69.6 R12.1 | R10.2 69.6,91.4 69.6,92.4 69.2,92.8 53.2,92.8 52.8,92.4 52.8,91.4 R11.2 52.8,91 52.8,90 51.6,89.2 51.6,69.6 | 81.2,54.25 CN4.2 | 84.91,66.91 84.8,66.8
  Top 0.61: MCU3.38 76,74 79.6,70.4 MCU3.29 82,70.4 82.4,70 82.4,69.6 | MCU3.5 71.2,70.4 75.2,66.4 MCU3.17 75.2,59.6 | SD3.VCC 84.91,66.91 84.91,68.29 83.6,69.6 82.4,69.6 | 58.8,69.6 51.6,69.6 | 82.4,69.6 82.4,69.2 82,68.8 MCU3.27
  Top 0.813: 51.6,69.6 51.6,60.33 52.33,59.6 75.2,59.6 80.4,59.6 80.4,59.2 v81.2,58.4 | 84.8,66.8 81.2,63.2 v81.2,58.4 | v81.2,58.4 81.2,54.25 | v91.04,59.6 82,59.6 82,59.2 v81.2,58.4
  Bottom 0.406: 81.17,58.37 v81.2,58.4
  Bottom 0.813: CN4.2 81.17,58.37 | J16.1 v91.04,59.6 91.04,61.83 91.67,62.47 J14.2
XTAL1
  Top 0.406: MCU.8 17.6,17.6 17.2,17.2 14,17.2 | 14,17.2 13.3,17.2 XTAL.1 | C2.2 14.6,15.4 14,16 14,17.2
XTAL2
  Top 0.406: C3.2 14.6,23 14,22.4 14,21.2 | MCU.7 17.6,18.4 14.8,21.2 14,21.2 | 14,21.2 13.3,21.2 XTAL.2
XTAL3
  Top 0.406: MCU1.8 68,17.6 67.6,17.2 64.4,17.2 | 64.4,17.2 63.7,17.2 XTAL1.1 | C5.2 65,15.4 64.4,16 64.4,17.2
XTAL4
  Top 0.406: C6.2 65,23 64.4,22.4 64.4,21.2 | MCU1.7 68,18.4 65.2,21.2 64.4,21.2 | 64.4,21.2 63.7,21.2 XTAL1.2
XTAL5
  Top 0.406: MCU2.8 17.6,68 17.2,67.6 14,67.6 | 14,67.6 13.3,67.6 XTAL2.1 | C8.2 14.6,65.8 14,66.4 14,67.6
XTAL6
  Top 0.406: C9.2 14.6,73.4 14,72.8 14,71.6 | MCU2.7 17.6,68.8 14.8,71.6 14,71.6 | 14,71.6 13.3,71.6 XTAL2.2
XTAL7
  Top 0.406: MCU3.8 68,68 67.6,67.6 64.4,67.6 | 64.4,67.6 63.7,67.6 XTAL3.1 | C11.2 65,65.8 64.4,66.4 64.4,67.6
XTAL8
  Top 0.406: C12.2 65,73.4 64.4,72.8 64.4,71.6 | MCU3.7 68,68.8 65.2,71.6 64.4,71.6 | 64.4,71.6 63.7,71.6 XTAL3.2

## Text on the board
tPlace: SD2IEC | SD2IEC | ReDesigned By / Özay Turay a.k.a Simon/CGTr / http://www.commodore.gen.tr | ReDesigned By / Özay Turay a.k.a Simon/CGTr / http://www.commodore.gen.tr | Original Design By / Lars Ole Pontoppidan / a.k.a LarsP / http://www.pontoppidan.info | Original Design By / Lars Ole Pontoppidan / a.k.a LarsP / http://www.pontoppidan.info | SD2IEC | SD2IEC | ReDesigned By / Özay Turay a.k.a Simon/CGTr / http://www.commodore.gen.tr | ReDesigned By / Özay Turay a.k.a Simon/CGTr / http://www.commodore.gen.tr | Original Design By / Lars Ole Pontoppidan / a.k.a LarsP / http://www.pontoppidan.info | Original Design By / Lars Ole Pontoppidan / a.k.a LarsP / http://www.pontoppidan.info